# EAGLE board flashcart 01 (EAGLE 5.03)

Size 100 x 80 mm. Coordinates in mm from the lower left corner, seen from the top.
Outline: 0,0 100,0 100,80 0,80 0,0
Copper layers (1*16): Top 0.035mm / dielectric 1.5mm / Bottom 0.035mm
Design rules "default": minimum track width 10mil, minimum drill 24mil, track to track 8mil, track to pad 8mil, pad to pad 8mil, via to via 8mil, smd to smd 8mil, copper to edge 40mil, drill to drill 8mil, minimum pad ring 10mil, minimum via ring 8mil, stop-mask expansion 4mil, vias tented up to drill 0mil, thermal gap 10mil

## Footprints (pad centres in the part's own frame; a part is rotated, then mirrored left to right if it is on the bottom)
TSOP32 = smd 0.36 x 1.2: 1 -3.75,-9.85; 2 -3.25,-9.85; 3 -2.75,-9.85; 4 -2.25,-9.85; 5 -1.75,-9.85; 6 -1.25,-9.85; 7 -0.75,-9.85; 8 -0.25,-9.85; 9 0.25,-9.85; 10 0.75,-9.85; 11 1.25,-9.85; 12 1.75,-9.85; 13 2.25,-9.85; 14 2.75,-9.85; 15 3.25,-9.85; 16 3.75,-9.85; 17 3.75,9.85; 18 3.25,9.85; 19 2.75,9.85; 20 2.25,9.85; 21 1.75,9.85; 22 1.25,9.85; 23 0.75,9.85; 24 0.25,9.85; 25 -0.25,9.85; 26 -0.75,9.85; 27 -1.25,9.85; 28 -1.75,9.85; 29 -2.25,9.85; 30 -2.75,9.85; 31 -3.25,9.85; 32 -3.75,9.85
CART = drill 1.2 offset: P$1 -38.1,0; P$2 -35.56,0; P$3 -33.02,0; P$4 -30.48,0; P$5 -27.94,0; P$6 -25.4,0; P$7 -22.86,0; P$8 -20.32,0; P$9 -17.78,0; P$10 -15.24,0; P$11 -12.7,0; P$12 -10.16,0; P$13 -7.62,0; P$14 -5.08,0; P$15 -2.54,0; P$16 0,0; P$17 2.54,0; P$18 5.08,0; P$19 7.62,0; P$20 10.16,0; P$21 12.7,0; P$22 15.24,0; P$23 17.78,0; P$24 20.32,0; P$25 22.86,0; P$26 25.4,0; P$27 27.94,0; P$28 30.48,0; P$29 33.02,0; P$30 35.56,0; P$31 -38.1,-6.35; P$32 -35.56,-6.35; P$33 -33.02,-6.35; P$34 -30.48,-6.35; P$35 -27.94,-6.35; P$36 -25.4,-6.35; P$37 -22.86,-6.35; P$38 -20.32,-6.35; P$39 -17.78,-6.35; P$40 -15.24,-6.35; P$41 -12.7,-6.35; P$42 -10.16,-6.35; P$43 -7.62,-6.35; P$44 -5.08,-6.35; P$45 -2.54,-6.35; P$46 0,-6.35; P$47 2.54,-6.35; P$48 5.08,-6.35; P$49 7.62,-6.35; P$50 10.16,-6.35; P$51 12.7,-6.35; P$52 15.24,-6.35; P$53 17.78,-6.35; P$54 20.32,-6.35; P$55 22.86,-6.35; P$56 25.4,-6.35; P$57 27.94,-6.35; P$58 30.48,-6.35; P$59 33.02,-6.35; P$60 35.56,-6.35

## Placement (x,y rotation side)
IC1  AM29F040E  [TSOP32]  40.64,29.21 180 top
U$1  CART  [CART]  46.99,13.97 0 top

## Library data of the parts
IC1 = am29-memory
U$1 = playpower

## Nets
GND: IC1.24
N$1: IC1.20 U$1.P$13
N$2: IC1.19 U$1.P$12
N$3: IC1.1 U$1.P$2
N$4: IC1.31 U$1.P$3
N$5: IC1.2 U$1.P$4
N$6: IC1.3 U$1.P$5
N$7: IC1.13 U$1.P$6
N$8: IC1.14 U$1.P$7
N$9: IC1.15 U$1.P$8
N$10: IC1.16 U$1.P$9
N$11: IC1.17 U$1.P$10
N$12: IC1.18 U$1.P$11
VCC: IC1.8

## Tracks (layer width: path | path; a pad name or v marks a point on that pad's centre or on a via)
N$1  (1 unrouted)
N$2  (1 unrouted)
N$3  (1 unrouted)
N$4  (1 unrouted)
N$5  (1 unrouted)
N$6  (1 unrouted)
N$7  (1 unrouted)
N$8  (1 unrouted)
N$9  (1 unrouted)
N$10  (1 unrouted)
N$11  (1 unrouted)
N$12  (1 unrouted)